# Altium PCB MODULE_BLE_PCB_V2I1.PcbDoc
Units mm, origin at the board's own origin, x right, y up, seen from the top; angles counter-clockwise.
Board outline 34.67 x 62.74 mm, 2 copper layers (Top Layer, Bottom Layer); 30 components, 40 nets, 158 pads, 37 vias.
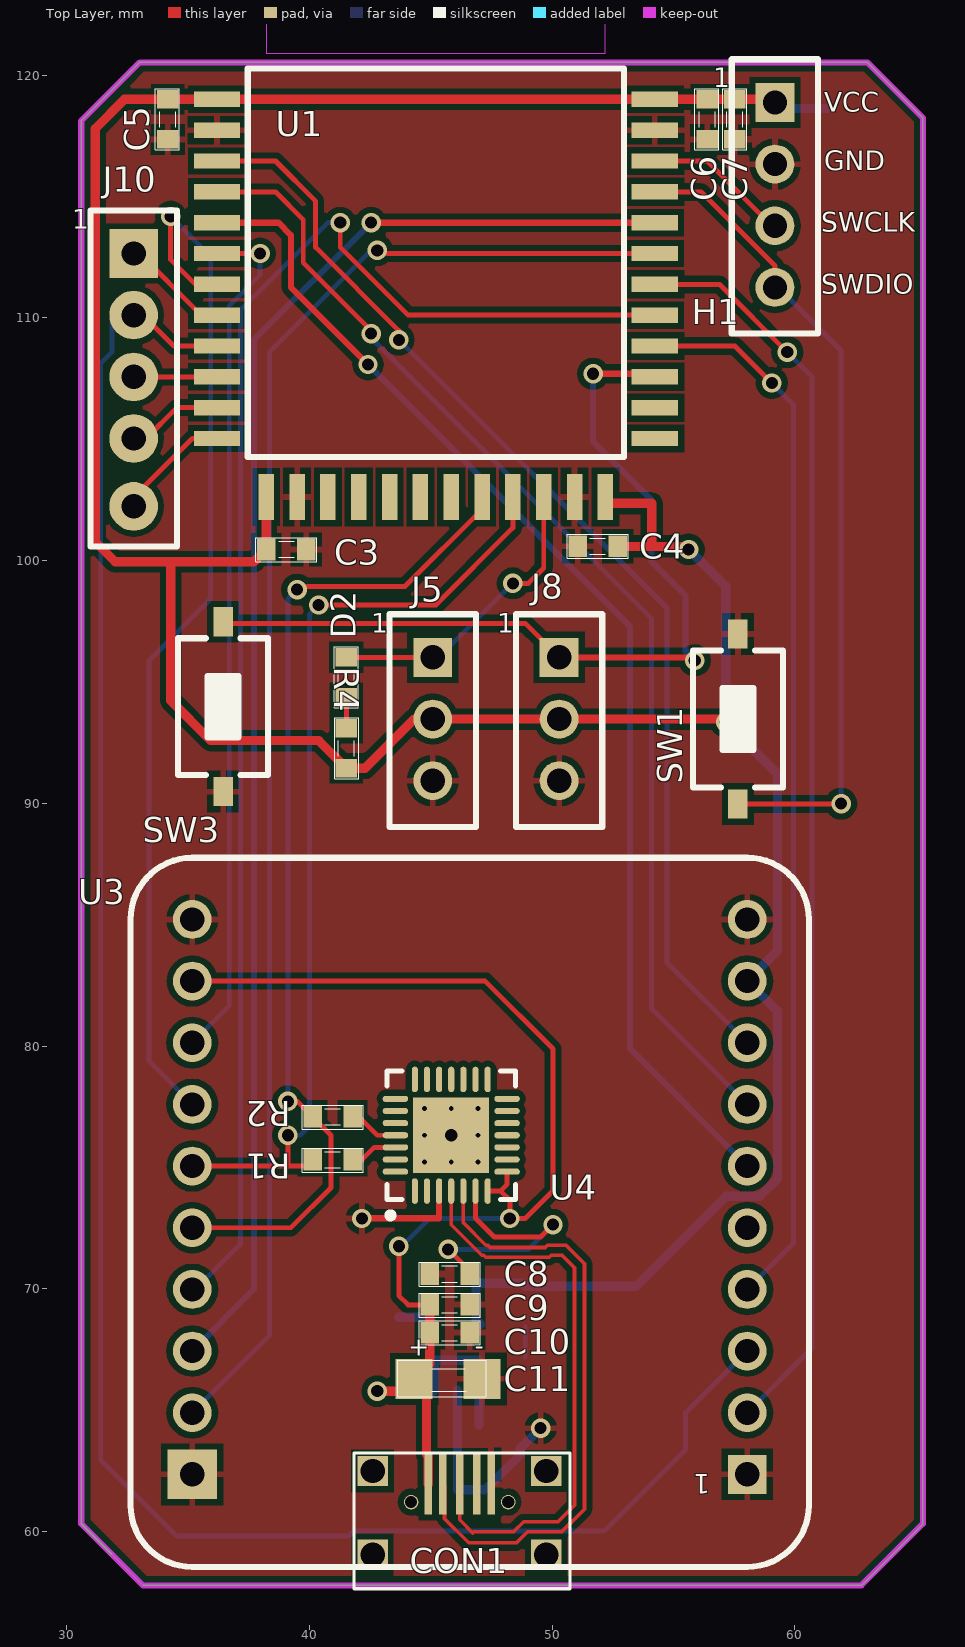
[diagram p0: Top Layer view]
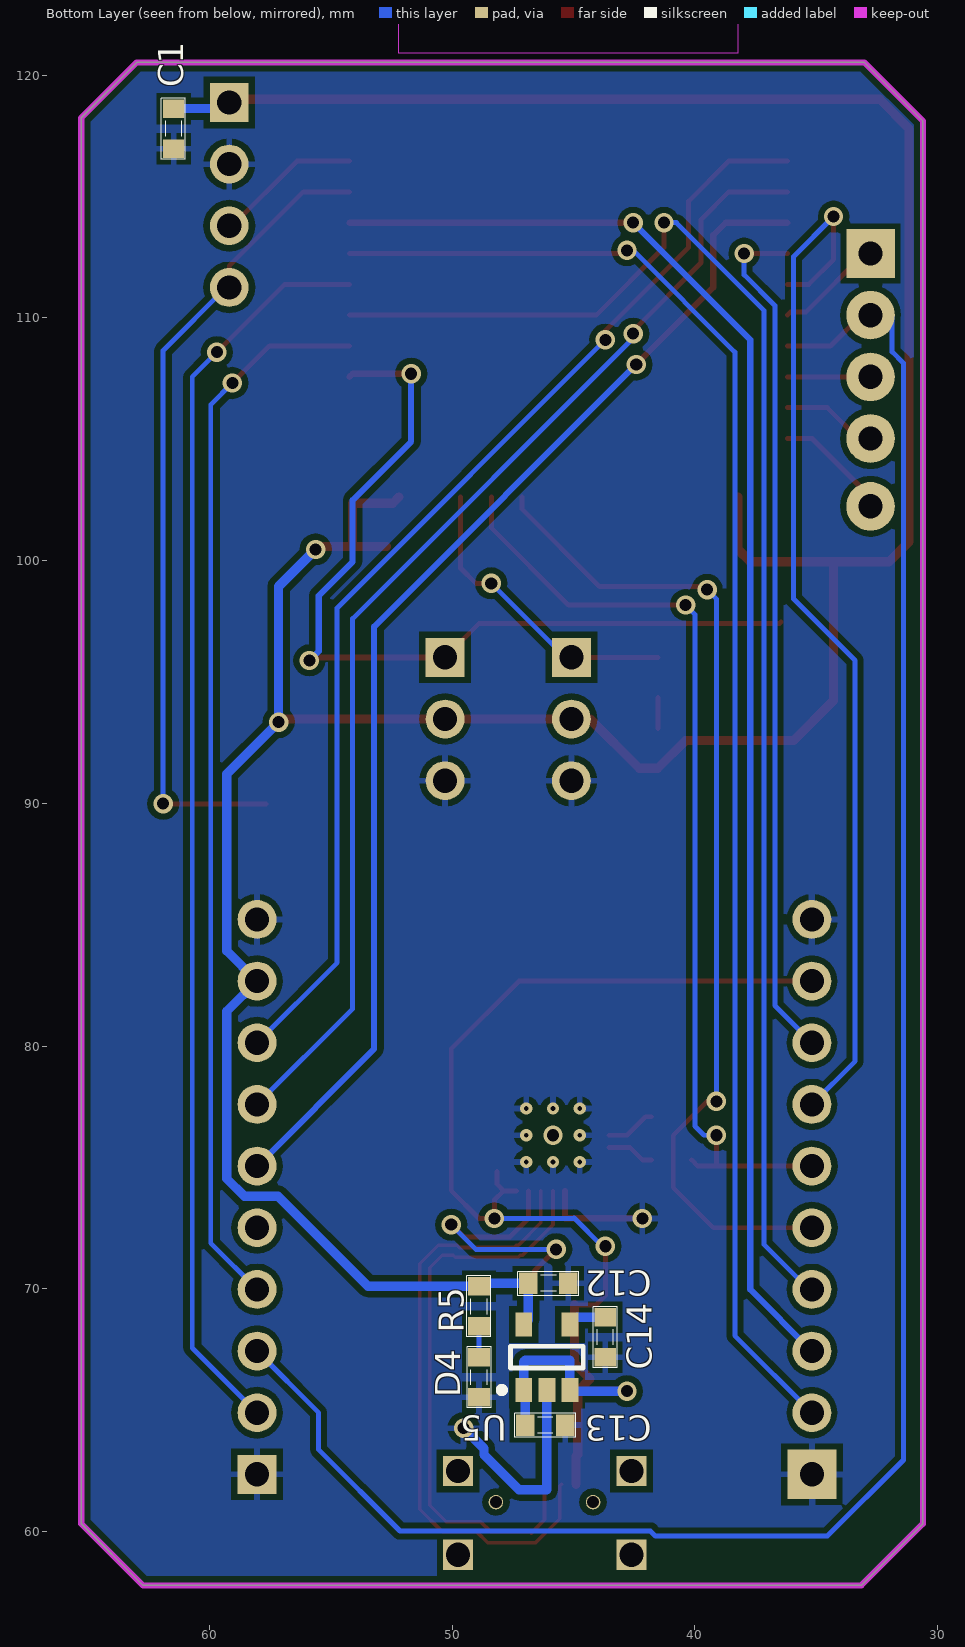
[diagram p1: Bottom Layer view, seen from below]
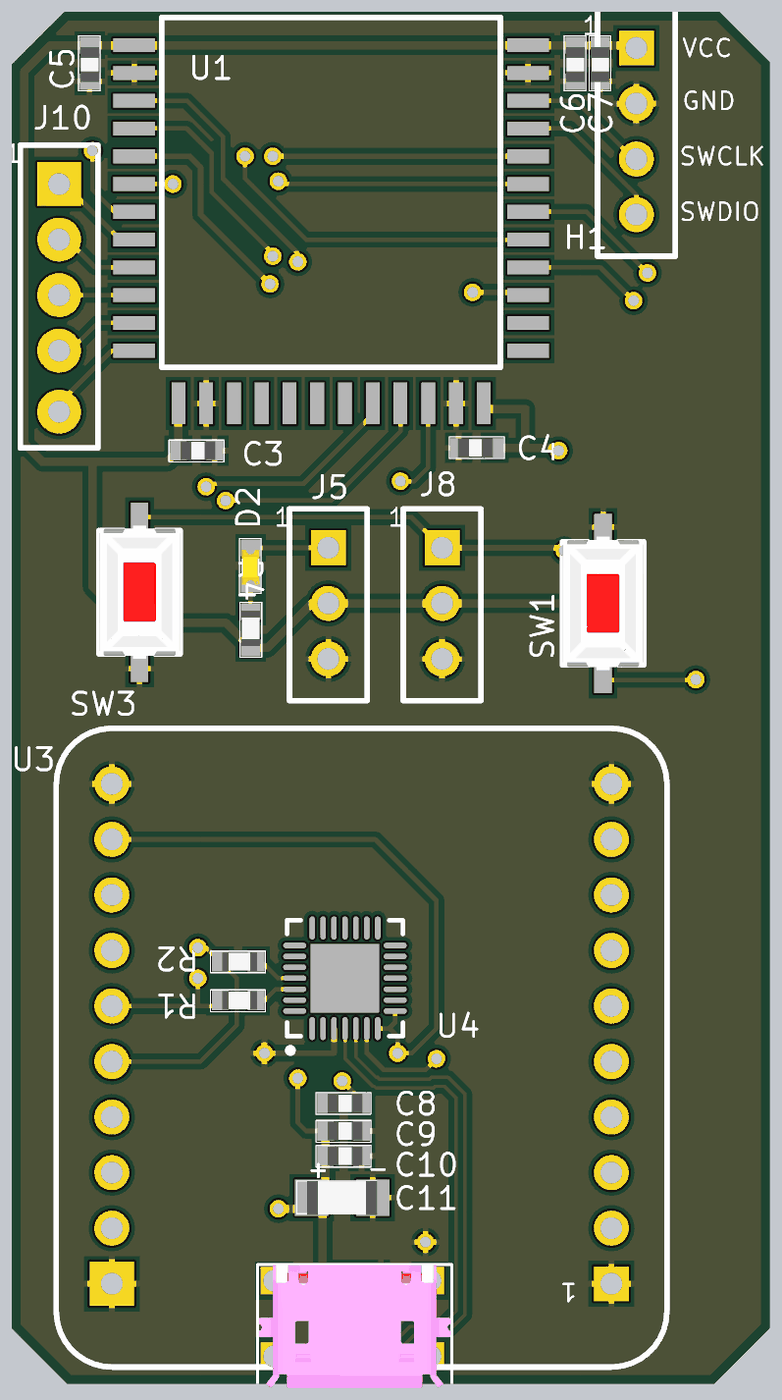
[diagram p2: 3D render of the assembled board from above, using the file's embedded part models]
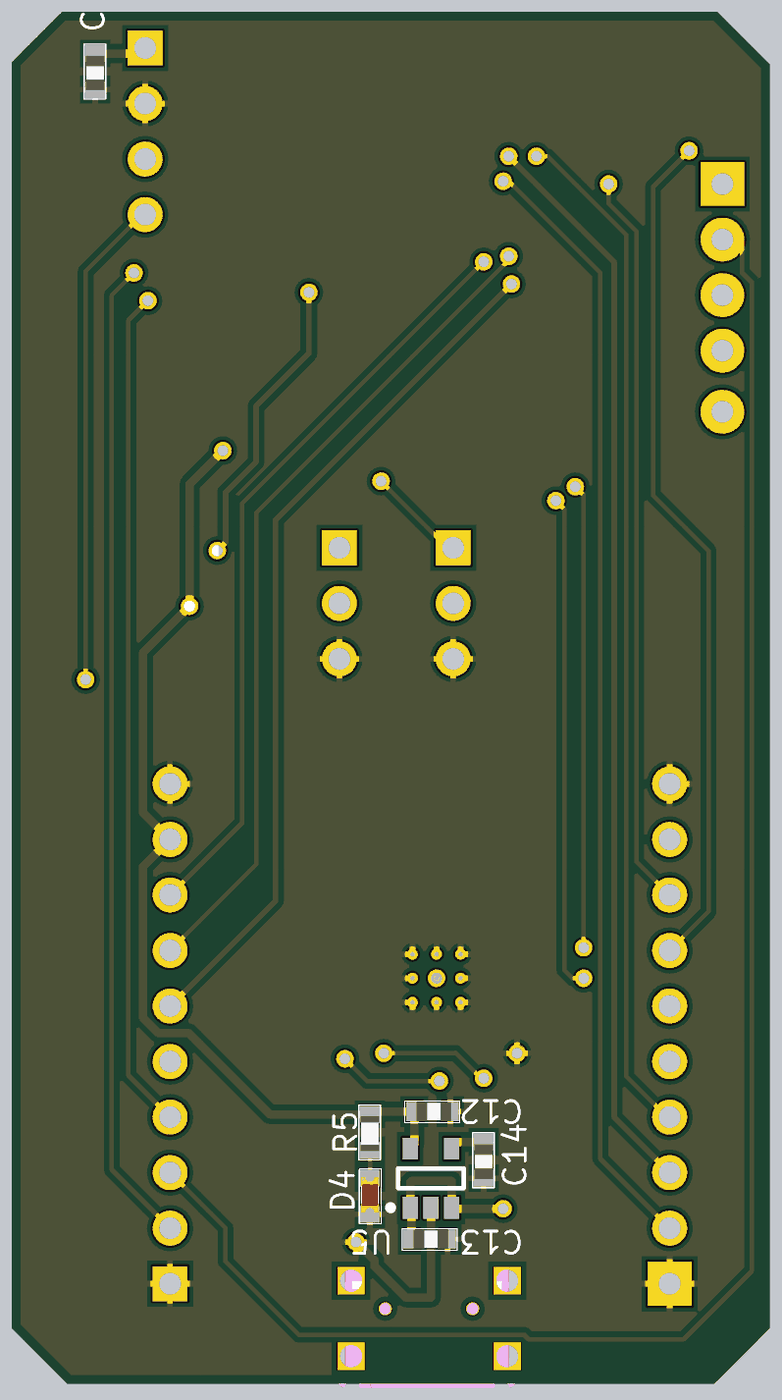
[diagram p3: 3D render of the assembled board from below, using the file's embedded part models]

## Layer stack, top to bottom
Top Solder: solder mask 0.0102, Solder Resist, Dk 3.5
Top Layer: signal copper 0.0356
Dielectric1: dielectric 0.32, FR-4, Dk 4.8
Bottom Layer: signal copper 0.0356
Bottom Solder: solder mask 0.0102, Solder Resist, Dk 3.5

## Board outline
30.607,60.325 30.607,118.11 33.02,120.523 62.992,120.523 65.278,118.237 65.278,60.325 62.738,57.785 33.147,57.785

## Design rules (kind name [scope] priority, off if disabled: settings)
Clearance [All] p1: gap=0.254
DiffPairsRouting [All] p1: maxlimit=0.381 minlimit=0.254 mostfreqgap=0.254 toplayer_minwidth=0.152 toplayer_maxwidth=0.381 toplayer_prefwidth=0.152 bottomlayer_maxgap=0.254 bottomlayer_minwidth=0.152 bottomlayer_maxwidth=0.381 bottomlayer_prefwidth=0.152 maxuncoupledlength=12.7
PolygonConnect [All] p1: connectstyle=Relief reliefconductorwidth=0.254 reliefentries=4 polygonreliefangle="90 Angle" airgapwidth=0.254
RoutingCorners [All] p1: cornerstyle=45-Degree minsetback=1.27 maxsetback=1.27
RoutingVias [All] p1: holewidth=0.5 width=0.8 viastyle="Through Hole" minholewidth=0.5 minwidth=0.8 maxholewidth=0.5 maxwidth=0.8
SilkToSolderMaskClearance SilkscreenOverComponentPads [IsPad] p1: minsilkscreentomaskgap=0.254 clearancetoexposedcopper=TRUE
SolderMaskExpansion [All] p1: expansion=0.102
Width [All] p1: maxlimit=0.508 minlimit=0.203 preferedwidth=0.203 minimp=50.000000 maximp=50.000000 favimp=50.000000
27 further rules are at their usual default settings.

## Classes and differential pairs
net class DIFF90: USB_N USB_P
differential pair USB: +USB_P -USB_N

## Components (designator, comment, footprint, x,y, rotation, side; value= is the part's Value field where it differs from the comment)
C1 "C_0.1F_0603_CERAMIC_16V" CAP_SMD0603 61.468,118.11 r90 bottom
C3 "C_0.1F_0603_CERAMIC_16V" CAP_SMD0603 38.735,100.457 r180 top
C4 "C_0.1F_0603_CERAMIC_16V" CAP_SMD0603 52.197,100.584 r0 top
C5 "C_0.1F_0603_CERAMIC_16V" CAP_SMD0603 34.163,118.491 r90 top
C6 "C_0.1F_0603_CERAMIC_16V" CAP_SMD0603 56.388,118.491 r90 top
C7 "C_10uF_0603_CERAMIC_16V" CAP_SMD0603 57.531,118.491 r90 top
C8 "C_0.1F_0603_CERAMIC_16V" CAP_SMD0603 45.466,70.612 r180 top
C9 "C_2.2uF_0603_CERAMIC_16V" CAP_SMD0603 45.466,69.342 r180 top
C10 "C_0.1F_0603_CERAMIC_16V" CAP_SMD0603 45.466,68.199 r180 top
C11 "C_10uF_1206_TANTALUM_25V" CAP_SMD1206_TANTALUM 45.466,66.294 r0 top
C12 "C_1uF_0603_CERAMIC_16V" CAP_SMD0603 46.355,70.231 r0 bottom
C13 "C_1uF_0603_CERAMIC_16V" CAP_SMD0603 46.482,64.389 r0 bottom
C14 "C_0.1F_0603_CERAMIC_16V" CAP_SMD0603 43.688,68.326 r90 bottom
CON1 "CONNECT_MICRO_USB_SURFACE" CON_MICRO_USB_HOLE 42.61,59.044 r0 top
D2 "LED2_YELLOW_0603_2.1V" LED_YELLOW_SMD0603 41.529,95.504 r90 top
D4 "LED2_RED_0603_2V" LED_RED_SMD0603 48.895,66.04 r270 bottom
H1 "HEADER4_ISP_NRF518XX_HOLE_2.54" HEADER4_ISP_HOLE_2.54 59.182,118.872 r0 top locked
J5 "CON_HEADER3_MALE_HOLE2.54" CON_HEADER3_HOLE_2.54 45.085,96.012 r0 top
J8 "CON_HEADER3_MALE_HOLE2.54" CON_HEADER3_HOLE_2.54 50.292,96.012 r0 top
J10 "CON_HEADER5_ADC" CON_HEADER5_HOLE_2.54 32.766,112.649 r0 top locked
R1 "R_1K2_SMD0603_1%_1/10W" RES_SMD0603 40.64,75.311 r180 top
R2 "R_1K2_SMD0603_1%_1/10W" RES_SMD0603 40.64,77.089 r180 top
R4 "R_1K2_SMD0603_1%_1/10W" RES_SMD0603 41.529,91.948 r270 top
R5 "R_10K_SMD0603_1%_1/10W" RES_SMD0603 48.895,69.596 r90 bottom
SW1 "SW2_RESET" SW2-SMD 57.658,93.472 r90 top
SW3 "SW2_DPST_SURFACE_5MM" SW2-SMD 36.449,93.98 r90 top
U1 "MODULE_BLE_NRF518XX" MODULE_NRF518xx 35.687,118.999 r0 top locked
U3 "SHIELD_MIKRO_BUS" SHIELD_MIKRO_BUS 58.039,62.357 r180 top locked
U4 "USB_CP2102-GMR" QFN_28PIN_USBC2102 45.847,76.327 r90 top
U5 "POWER_LDO_LD3985_3.3V_SOT-23-5" POWER_LDO_LDR3985-3.3 46.101,67.183 r90 bottom

## Footprints (in the part's own frame and the unit in brackets; to place one, negate y for a bottom-side part, rotate by r counter-clockwise, add the part's x,y. Pads: shape width x height; smd on the part's side, far side on the other; paste and mask are expansions set on the pad)
CAP_SMD0603 [mil] "Compoment SMD 60x30mil"
  rect 30x35 smd: 1(-45,0) 2(20,0)
  silkscreen extent -62,-19 37,20, body extent -46,-17 16,17, height 33
CAP_SMD1206_TANTALUM [mil] "Compoment SMD 80x50mil"
  rect 60x65 smd: 1(-45,0) 2(65,0)
  silkscreen extent -72,-29 72,30, body extent -53,-31 73,30, height 65
CON_HEADER3_HOLE_2.54 [mm] "HEADER, SINGLE, DISTANCE = 100mil"
  rect 1.6x1.6 hole 1: 1(0,0)
  round 1.6 hole 1: 2(0,-2.54) 3(0,-5.08)
  silkscreen extent -1.78,-6.98 1.78,1.78
CON_HEADER5_HOLE_2.54 [mm] "HEADER, SINGLE, DISTANCE = 100mil"
  rect 2x2 hole 1: 1(0,0)
  round 2 hole 1: 2(0,-2.54) 3(0,-5.08) 4(0,-7.62) 5(0,-10.414)
  silkscreen extent -1.78,-12.06 1.78,1.78
CON_MICRO_USB_HOLE [mm]
  rect 0.3x2.5 smd mask+0.05: 1(2.286,2.91) 2(2.886,2.91) 3(3.586,2.91) 4(4.286,2.91) 5(4.886,2.91)
  rect 1.25x1.25 hole 1 mask+0.05: ""(0,0) ""(0,3.45) ""(7.15,0) ""(7.15,3.45)
  round 0.6 hole 0.5 mask+0.05: ""(1.586,2.17) ""(5.586,2.17)
  silkscreen extent -0.76,-1.4 8.13,4.19, body extent -0.72,-1.45 8.08,4.18, height 2.77
HEADER4_ISP_HOLE_2.54 [mm] "HEADER, SINGLE, DISTANCE = 100mil"
  rect 1.6x1.6 hole 1: 1(0,0)
  round 1.6 hole 1: 2(0,-2.54) 3(0,-5.08) 4(0,-7.62)
  silkscreen extent -1.78,-9.53 1.78,1.78
LED_RED_SMD0603 [mil] "Compoment SMD 60x30mil"
  rect 30x35 smd: 1(-45,0) 2(20,0)
  silkscreen extent -62,-19 37,20, body extent -46,-16 16,16, height 24
LED_YELLOW_SMD0603 [mil] "Compoment SMD 60x30mil"
  rect 30x35 smd: 1(-45,0) 2(20,0)
  silkscreen extent -62,-19 37,20, body extent -46,-16 17,16, height 24
MODULE_NRF518xx [mil] "MODULE BLE NRF51822 Madeby TUAN ANH"
  rect 75x25 smd: 1(20,0) 2(20,-50) 3(20,-100) 4(20,-150) 5(20,-200) 6(20,-250) 7(20,-300) 8(20,-350) 9(20,-400) 10(20,-450) 11(20,-500) 12(20,-550) 25(730,-550) 26(730,-500) 27(730,-450) 28(730,-400) 29(730,-350) 30(730,-300) 31(730,-250) 32(730,-200) 33(730,-150) 34(730,-100) 35(730,-50) 36(730,0)
  rect 25x75 smd: 13(100,-645) 14(150,-645) 15(200,-645) 16(250,-645) 17(300,-645) 18(350,-645) 19(400,-645) 20(450,-645) 21(500,-645) 22(550,-645) 23(600,-645) 24(650,-645)
  Keep-Out Layer region: 100,250 100,75 650,75 650,250
  silkscreen extent 70,-580 680,50, body extent 20,-630 730,45, height 59
POWER_LDO_LDR3985-3.3 [mm] "SOT23, 5-Leads, Body 2.90x2.80mm, Pitch 0.95mm, IPC Medium Density"
  rect 1x0.7 smd: 1(-1.35,0.95) 2(-1.35,0) 3(-1.35,-0.95) 4(1.35,-0.95) 5(1.35,0.95)
  silkscreen extent -1.47,-1.5 0.45,1.98, body extent -0.85,-1.5 0.85,1.5, height 0.9
QFN_28PIN_USBC2102 [mm] "QFN, 28-Leads, Body 5.00x5.00mm, Pitch 0.50mm, Thermal Pad 3.13x3.13mm, IPC Medium Density"
  oval 1.05x0.25 smd: 1(-2.3,1.5) 2(-2.3,1) 3(-2.3,0.5) 4(-2.3,0) 5(-2.3,-0.5) 6(-2.3,-1) 7(-2.3,-1.5) 15(2.3,-1.5) 16(2.3,-1) 17(2.3,-0.5) 18(2.3,0) 19(2.3,0.5) 20(2.3,1) 21(2.3,1.5)
  oval 0.25x1.05 smd: 8(-1.5,-2.3) 9(-1,-2.3) 10(-0.5,-2.3) 11(0,-2.3) 12(0.5,-2.3) 13(1,-2.3) 14(1.5,-2.3) 22(1.5,2.3) 23(1,2.3) 24(0.5,2.3) 25(0,2.3) 26(-0.5,2.3) 27(-1,2.3) 28(-1.5,2.3)
  rect 3.13x3.13 smd: 29(0,0)
  silkscreen extent -3.42,-2.65 2.65,2.65, body extent -2.5,-2.5 2.5,2.5, height 0.8
RES_SMD0603 [mil] "Compoment SMD 60x30mil"
  rect 30x35 smd: 1(-45,0) 2(20,0)
  silkscreen extent -62,-19 37,20, body extent -46,-17 17,17, height 19
SHIELD_MIKRO_BUS [mm] "HEADER, SINGLE, DISTANCE = 100mil"
  rect 1.6x1.6 hole 1: 1(0,0)
  round 1.6 hole 1: 2(0,-2.54) 3(0,-5.08) 4(0,-7.62) 5(0,-10.16) 6(0,-12.7) 7(0,-15.24) 8(0,-17.78) 9(0,-20.32) 10(0,-22.86) 11(22.86,-22.86) 12(22.86,-20.32) 13(22.86,-17.78) 14(22.86,-15.24) 15(22.86,-12.7) 16(22.86,-10.16) 17(22.86,-7.62) 18(22.86,-5.08) 19(22.86,-2.54)
  rect 2.032x2.032 hole 1: 20(22.86,0)
  silkscreen extent -2.54,-25.4 25.4,3.81
SW2-SMD [mm] "Switch SMD type"
  rect 1.2x0.8 smd: 1(-3.5,0) 2(3.5,0)
  silkscreen extent -2.82,-1.85 2.82,1.85, body extent -3.05,-1.85 3.05,1.85, height 2.5

## Part data
C1 C3 C4 C5 C6 C8 C10 C14: "CAP CER 0.1UF 16V X7R 0603"
C7: "CAP CER 10UF 16V X5R 0603"
C9: "CAP CER 2.2UF 16V X5R 0603"
C11: "CAP TANT 10UF 25V 10% 1206"
C12 C13: "CAP CER 1UF 16V X5R 0603"
CON1: "CONN RCPT STD MICRO USB TYPE B"
D2: "LED YELLOW CLEAR 0603 SMD"
D4: "LED RED CLEAR 0603 SMD"
H1: "CONN HEADER 4POS .100 STR TIN"
J5 J8: "CON_HEADER10_HOLE2.54"
J10: library part CON_HEADER5_MALE_HOLE2.54, "CON_HEADER10_HOLE2.54"
R1 R2 R4: "RES SMD 1.2K OHM 1% 1/10W 0603"
R5: "RES SMD 10K OHM 1% 1/10W 0603"
SW1: library part SW2_DPST_SURFACE_5MM, "SWITCH TACTILE SPST-NO 0.05A 12V"
SW3: "SWITCH TACTILE SPST-NO 0.05A 12V"
U4: "IC USB-TO-UART BRIDGE 28VQFN"
U5: "IC REG LDO 3.3V 0.15A SOT23-5"

## Via types
v1: diameter 0.8, hole 0.5, Top Layer to Bottom Layer, 28 vias
v2: diameter 0.5, hole 0.2, Top Layer to Bottom Layer, 9 vias

## Nets (pads, with @x,y where several pads share a name; then routed paths per layer and width w, separated by ;. In a path a pad name is that pad's centre, name@x,y a point inside that pad or via, vN(x,y) a via of type N, cw(c..) or ccw(c..) an arc to the next point about the centre after c; other vN are vias at no path point)
5VCC_USB: C9.2 C10.2 C11.1 C13.2 CON1.1 U3.12 U4.7 U4.8 U5.1 U5.3 | length 53.5
  Top Layer w0.203: U3.12 47.244,82.677 50.038,79.883 50.038,74.041 48.895,72.898 v1(48.26,72.898) 48.26,73.66 47.893,74.027 47.865,74.027 ; v1(43.688,71.755) 43.688,69.723 44.069,69.342 C9.2 ; U4.7 47.865,74.027 ; U4.8 48.147,74.309 47.865,74.027
  Top Layer w0.381: v1(42.799,65.786) C11.1@44.831,65.786 ; CON1.1 44.896,63.114 44.831,63.179 C11.1@44.831,65.786 ; C9.2 C10.2 44.958,66.929 C11.1 C11.1@44.831,65.786
  Bottom Layer w0.203: v1(43.688,71.755) 43.815,71.755 44.982,72.922 45.006,72.898 v1(48.26,72.898)
  Bottom Layer w0.381: v1(42.799,65.786) 45.104,65.786 U5.3 45.151,67.056 46.99,67.056 47.051,66.995 U5.1 46.99,65.772 C13.2
AIN2: J10.2 U1.9 U3.3 | length 84.2
  Top Layer w0.203: J10.2 33.147,110.109 34.417,108.839 U1.9
  Bottom Layer w0.203: J10.2 31.877,110.109 31.877,108.597 31.41,108.131 31.41,62.951 34.544,59.817 41.63,59.817 41.838,60.025 52.151,60.025 55.499,63.373 55.499,64.897 U3.3
AIN3: J10.3 U1.10 | length 3.4
  Top Layer w0.203: J10.3 U1.10
AIN4: J10.4 U1.11 | length 4
  Top Layer w0.203: J10.4 33.274,105.029 34.544,106.299 U1.11
AIN5: J10.5 U1.12 | length 4.8
  Top Layer w0.203: J10.5 32.766,102.616 35.179,105.029 U1.12
AIN6: U1.15
AIN7: U1.16
AREF0: J10.1 U1.8 | length 4.5
  Top Layer w0.203: J10.1 33.02,112.649 35.433,110.236 36.068,110.236 U1.8
GND_USB: C1.1 C3.1 C4.1 C5.1 C6.1 C7.1 C8.2 C9.1 C10.1 C11.2 C12.1 C13.1 C14.1 CON1.5 D4.2 H1.2 J5.3 J8.3 SW1.2 SW3.1 U1.2 U1.14 U1.23 U1.35 U3.1 U3.10 U3.11 U3.20 U4.3 U4.29 U5.2 | length 13
  Top Layer w0.254: v1(42.164,72.898) 42.172,72.906 45.347,72.906 U4.3
  Bottom Layer w0.381: U5.2 46.101,61.722 47.244,61.722 48.691,63.169 48.691,63.423 v1(49.53,64.262)
  other v1: 45.847,76.327
  other v2: 44.747,75.227 45.847,75.227 46.947,75.227 44.747,76.327 45.847,76.327 46.947,76.327 44.747,77.427 45.847,77.427 46.947,77.427
ISP_PROG: U1.18
LED_BLE1: D2.2 J5.1 U1.22 | length 12.6
  Top Layer w0.203: D2.2 J5.1 ; v1(48.387,99.06) 49.022,99.06 49.657,99.695 U1.22
  Bottom Layer w0.203: J5.1 45.339,96.012 v1(48.387,99.06)
LED_BLE2: U1.25
LED_UART: U1.17
NetC8_1: C8.1 U4.6 | length 11
  Top Layer w0.203: v1(45.72,71.628) 46.609,70.739 C8.1 ; U4.6 46.847,72.914 47.625,72.136 49.53,72.136 v1(50.038,72.644)
  Bottom Layer w0.203: v1(45.72,71.628) 49.022,71.628 v1(50.038,72.644)
NetC14_2: C14.2 U5.4 | length 1.6
  Bottom Layer w0.381: C14.2 44.85,68.834 U5.4
NetD2_1: D2.1 R4.1 | length 1.3
  Top Layer w0.203: R4.1 D2.1
NetD4_1: D4.1 R5.1 | length 1.3
  Bottom Layer w0.203: D4.1 R5.1
NetR1_1: R1.1 U4.26 | length 2
  Top Layer w0.203: R1.1 42.164,75.311 42.68,75.827 U4.26
NetR2_1: R2.1 U4.25 | length 2.1
  Top Layer w0.203: R2.1 42.037,77.089 42.799,76.327 U4.25
NRF_RXD: R1.2 U1.21 U3.15 | length 39.6
  Top Layer w0.203: U3.15 39.116,75.057 ; v1(39.116,76.327) 39.116,75.057 ; R1.2 39.878,75.057 39.116,75.057 ; v1(40.386,98.171) 45.212,98.171 48.387,101.346 U1.21
  Bottom Layer w0.203: v1(39.116,76.327) 39.624,76.327 40.005,76.708 40.005,97.79 v1(40.386,98.171)
NRF_TXD: R2.2 U1.20 U3.16 | length 41.6
  Top Layer w0.203: U3.16 39.243,72.517 40.894,74.168 40.894,76.327 R2.2 39.497,77.724 v1(39.116,77.724) ; v1(39.497,98.806) 39.624,98.933 43.937,98.933 47.117,102.113 U1.20
  Bottom Layer w0.203: v1(39.116,77.724) 39.116,98.425 v1(39.497,98.806)
P0.09: U1.19
P0.14: U1.26
P0.15: J8.1 SW3.2 U1.27 | length 36.2
  Top Layer w0.203: SW3.2 36.514,97.415 48.889,97.415 J8.1
  Top Layer w0.254: J8.1 55.753,96.012 v1(55.88,95.885) ; v1(51.689,107.696) 54.102,107.696 U1.27
  Bottom Layer w0.254: v1(51.689,107.696) 51.689,104.902 54.102,102.489 54.102,99.949 55.499,98.552 55.499,96.266 v1(55.88,95.885)
P0.16: U1.28 U3.4 | length 44
  Top Layer w0.203: U1.28 57.531,108.839 v1(59.055,107.315)
  Bottom Layer w0.203: U3.4 59.944,71.882 59.944,106.426 v1(59.055,107.315)
P0.17: U1.29 U3.17 | length 62
  Top Layer w0.203: v1(41.275,113.919) 41.275,112.903 44.069,110.109 U1.29
  Bottom Layer w0.203: U3.17 35.306,69.977 37.16,71.831 37.16,110.312 40.767,113.919 v1(41.275,113.919)
P0.18: U1.30 U3.2 | length 51.8
  Top Layer w0.203: U1.30 56.896,111.379 v1(59.69,108.585)
  Bottom Layer w0.203: U3.2 60.706,67.564 60.706,107.569 v1(59.69,108.585)
P0.19: U1.31 U3.19 | length 62.7
  Top Layer w0.203: v1(42.799,112.776) 42.926,112.649 U1.31
  Bottom Layer w0.203: U3.19 38.354,68.072 38.354,108.585 42.545,112.776 v1(42.799,112.776)
P0.20: U1.32 U3.18 | length 61.2
  Top Layer w0.254: v1(42.545,113.919) U1.32
  Bottom Layer w0.254: U3.18 37.719,69.977 37.719,109.093 v1(42.545,113.919)
P0.23: U3.5
P0.24: U1.3 U3.8 | length 46.8
  Top Layer w0.203: U1.3 38.608,116.459 40.259,114.808 40.259,112.903 43.688,109.474 v1(43.688,109.093)
  Bottom Layer w0.203: v1(43.688,109.093) 54.737,98.044 54.737,83.439 U3.8
P0.25: U1.4 U3.7 | length 48.1
  Top Layer w0.203: U1.4 38.608,115.189 39.751,114.046 39.751,112.268 42.545,109.474 v1(42.545,109.347)
  Bottom Layer w0.203: v1(42.545,109.347) 42.545,109.167 54.102,97.61 54.102,81.534 U3.7
P0.28: U1.5 U3.6 | length 49.4
  Top Layer w0.254: U1.5 38.735,113.919 39.243,113.411 39.243,111.252 v1(42.418,108.077)
  Bottom Layer w0.254: v1(42.418,108.077) 53.213,97.282 53.213,79.883 U3.6
P0.29: U1.6 U3.13 | length 35.4
  Top Layer w0.203: U1.6 v1(37.973,112.649)
  Bottom Layer w0.203: U3.13 36.703,81.661 36.703,110.502 37.973,111.772 v1(37.973,112.649)
P0.30: U1.7 U3.14 | length 43.4
  Top Layer w0.203: v1(34.29,114.173) 34.29,112.395 35.306,111.379 U1.7
  Bottom Layer w0.203: v1@34.122,114.005 v1(34.29,114.173) 35.941,112.522 35.941,98.425 33.401,95.885 33.401,79.375 U3.14
SWCLK: H1.3 U1.34 | length 6.1
  Top Layer w0.203: U1.34 56.388,116.459 59.055,113.792 H1.3
SWDIO: H1.4 SW1.1 U1.33 | length 33.8
  Top Layer w0.203: U1.33 56.134,115.189 59.182,112.141 H1.4 ; SW1.1 61.905,89.972 v1(61.905,89.987)
  Bottom Layer w0.203: H1.4 59.309,111.252 61.905,108.656 v1(61.905,89.987)
USB_N: CON1.2 U4.5 | length 25.4
  Top Layer w0.152: CON1.2 45.572,61.878 45.572,60.533 46.568,59.538 48.537,59.538 48.998,59.999 50.414,59.999 51.333,60.919 51.333,71.034 50.575,71.793 49.798,71.793 49.709,71.704 47.446,71.704 47.357,71.793 47.273,71.793 46.347,72.719 U4.5
USB_P: CON1.3 U4.4 | length 24
  Top Layer w0.152: U4.4 45.847,72.644 47.104,71.387 47.189,71.387 47.278,71.298 49.877,71.298 49.966,71.387 50.406,71.387 50.927,70.866 50.927,61.087 50.246,60.406 48.83,60.406 48.423,59.999 46.791,59.999 46.736,59.944 46.196,60.484 CON1.3
VCC: C1.2 C3.2 C4.2 C5.2 C6.2 C7.2 C12.2 H1.1 J5.2 J8.2 R4.2 R5.2 U1.1 U1.13 U1.24 U1.36 U3.9 U5.5 | length 139.7
  Top Layer w0.381: U1.13 C3.2 37.719,99.949 34.29,99.949 ; U1.24 52.451,102.362 54.102,102.362 54.102,100.584 ; C4.2 54.102,100.584 ; v1(55.626,100.457) 55.626,100.584 54.102,100.584 ; v1(57.15,93.345) 57.023,93.472 J8.2 J5.2 44.323,93.472 42.291,91.44 R4.2 40.386,92.583 35.941,92.583 34.29,94.234 34.29,99.949 ; H1.1 59.055,118.999 C7.2 C6.2 U1.36 U1.1 C5.2 32.385,118.999 31.178,117.792 31.178,100.774 32.004,99.949 34.29,99.949
  Bottom Layer w0.381: U5.5 46.863,68.721 C12.2 48.768,70.231 R5.2 53.467,70.104 57.175,73.812 58.554,73.812 59.284,74.542 59.284,81.432 U3.9 59.284,83.922 59.284,91.211 v1(57.15,93.345) 57.15,98.933 v1(55.626,100.457) ; H1.1 59.436,118.618 C1.2
pads on no net: CON1. CON1.4 U4.1 U4.2 U4.9 U4.10 U4.11 U4.12 U4.13 U4.14 U4.15 U4.16 U4.17 U4.18 U4.19 U4.20 U4.21 U4.22 U4.23 U4.24 U4.27 U4.28

## Polygon pours and split planes (outlines as drawn)
GND_USB on Bottom Layer "Top Layer-No Net" (solid, remove dead copper, pour order 24): 25.908,123.952 67.945,123.952 69.596,122.301 69.596,44.069 30.099,44.069 23.622,50.546
GND_USB on Top Layer "Top Layer-No Net" (solid, remove dead copper, pour order 30): 27.559,122.682 27.686,122.555 67.31,122.555 67.31,54.991 68.199,54.102 67.183,55.118 27.432,55.118

## Keep-outs
Keep-Out Layer:
  lines w0.254: 30.607,60.325 30.607,118.11 33.02,120.523 46.482,120.523 62.992,120.523 65.278,118.237 65.278,60.325 62.738,57.785 33.147,57.785 30.607,60.325

## Text inside footprints (layer, text, board x,y; h text height)
C11: Top Overlay "-" at 46.812,67.285 h0.76; Top Overlay "+" at 44.069,67.234 h0.76
H1: Top Overlay "1" at 56.642,119.507 h0.8; Top Overlay "VCC" at 61.214,118.491 h0.8; Top Overlay "GND" at 61.214,116.078 h0.8; Top Overlay "SWCLK" at 61.087,113.538 h0.8; Top Overlay "SWDIO" at 61.087,110.998 h0.8
J5: Top Overlay "1" at 42.545,97.028 h0.8
J8: Top Overlay "1" at 47.752,97.028 h0.8
J10: Top Overlay "1" at 30.226,113.665 h0.8
U3: Top Overlay "1" at 56.515,62.357 h0.8 r180